# Altium PCB 2012_fdp_balise_mere.PcbDoc
Units mil, origin at the board's own origin, x right, y up, seen from the top; angles counter-clockwise.
Board outline 2776.01 x 2776 mil, 4 copper layers (1-TOP, 2-SIGNAL, 3-SIGNAL, 4-BOT); 69 components, 63 nets, 277 pads, 93 vias.
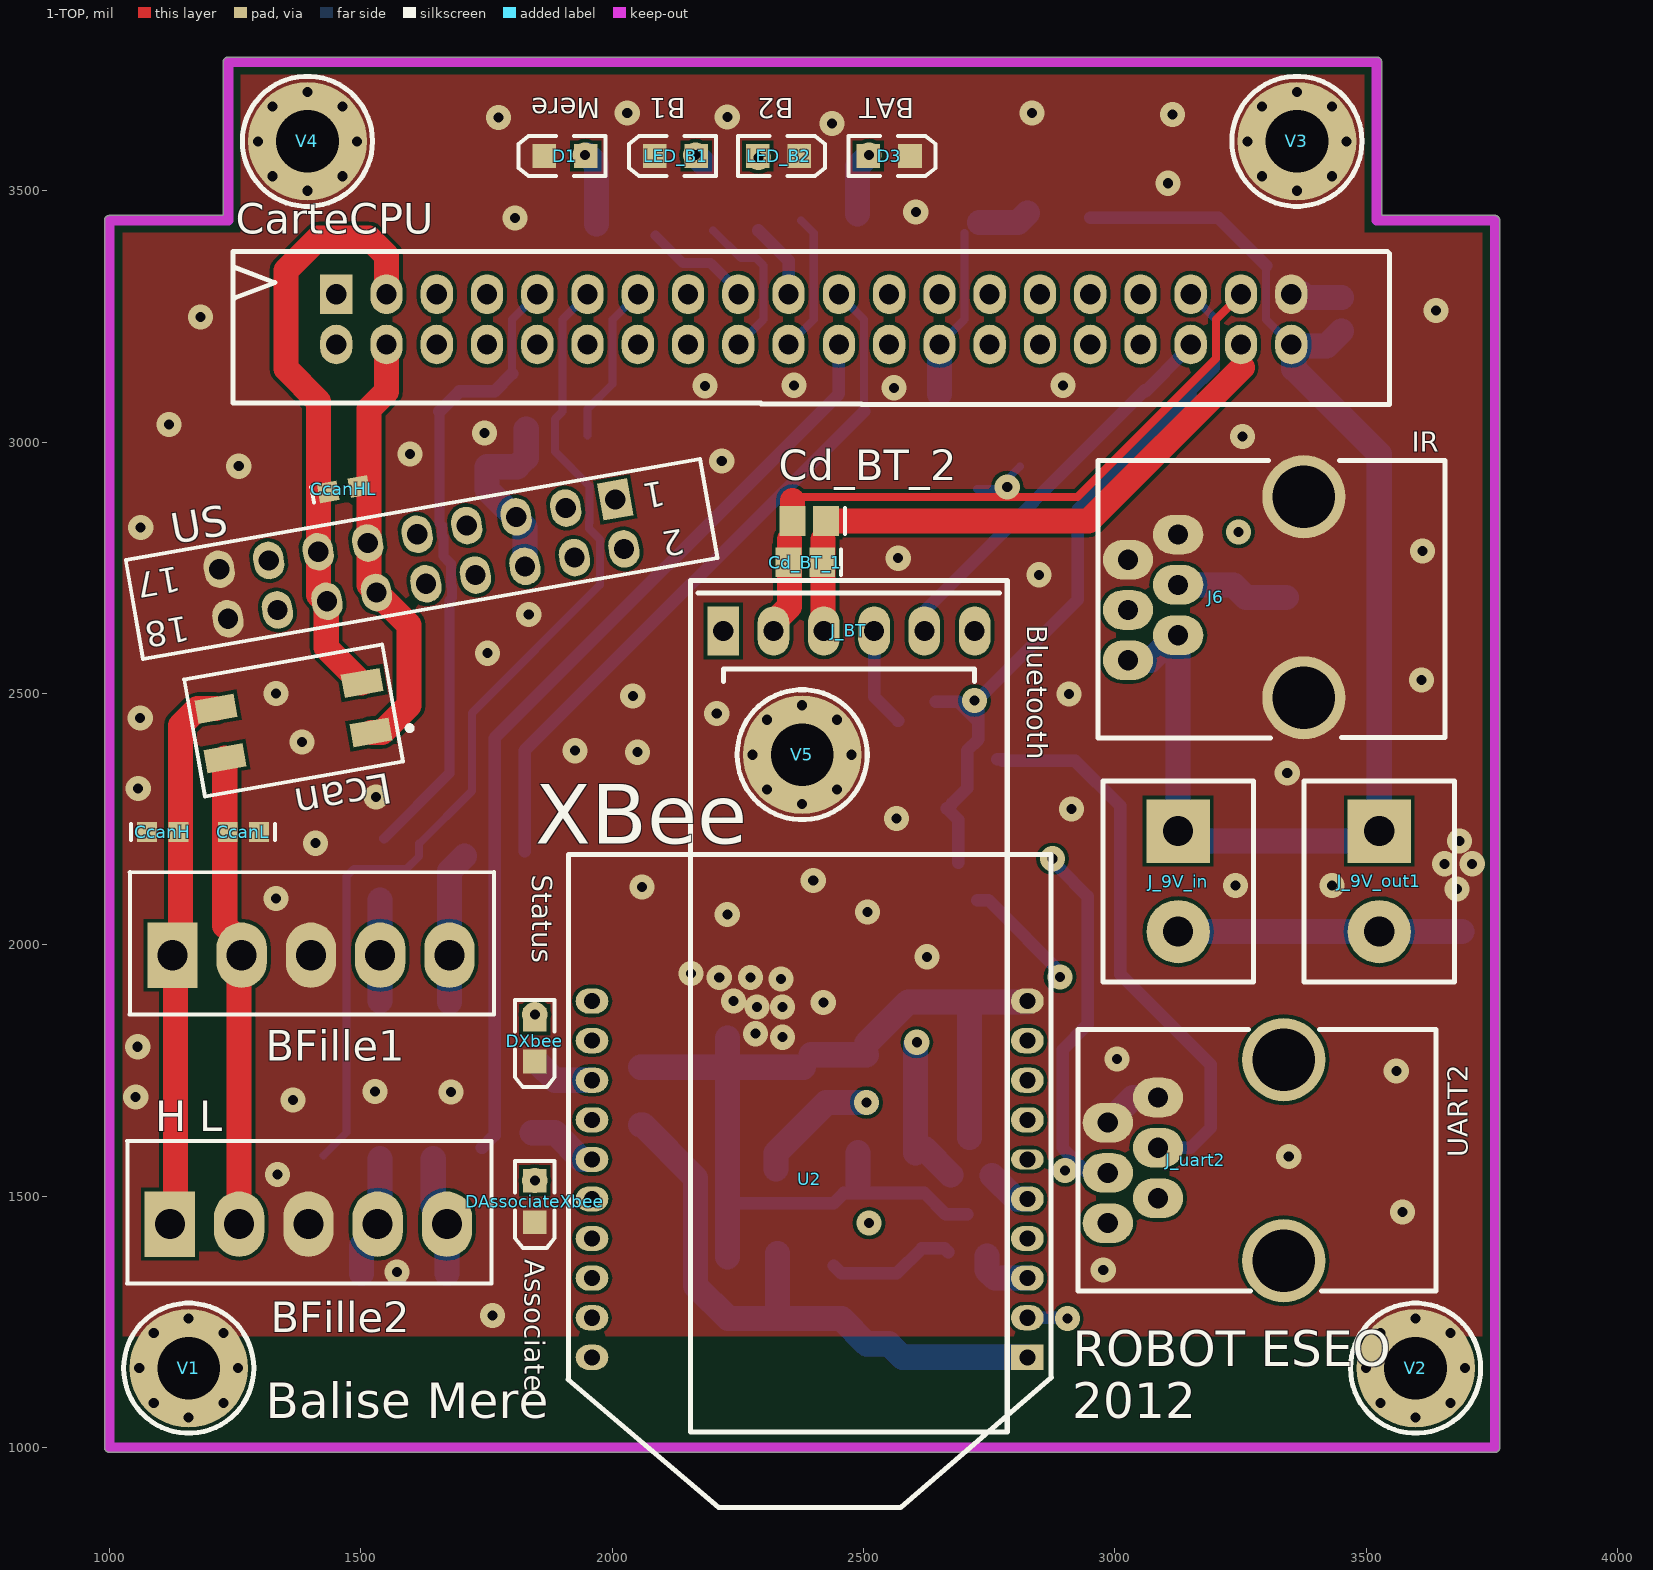
[diagram p0: 1-TOP view]
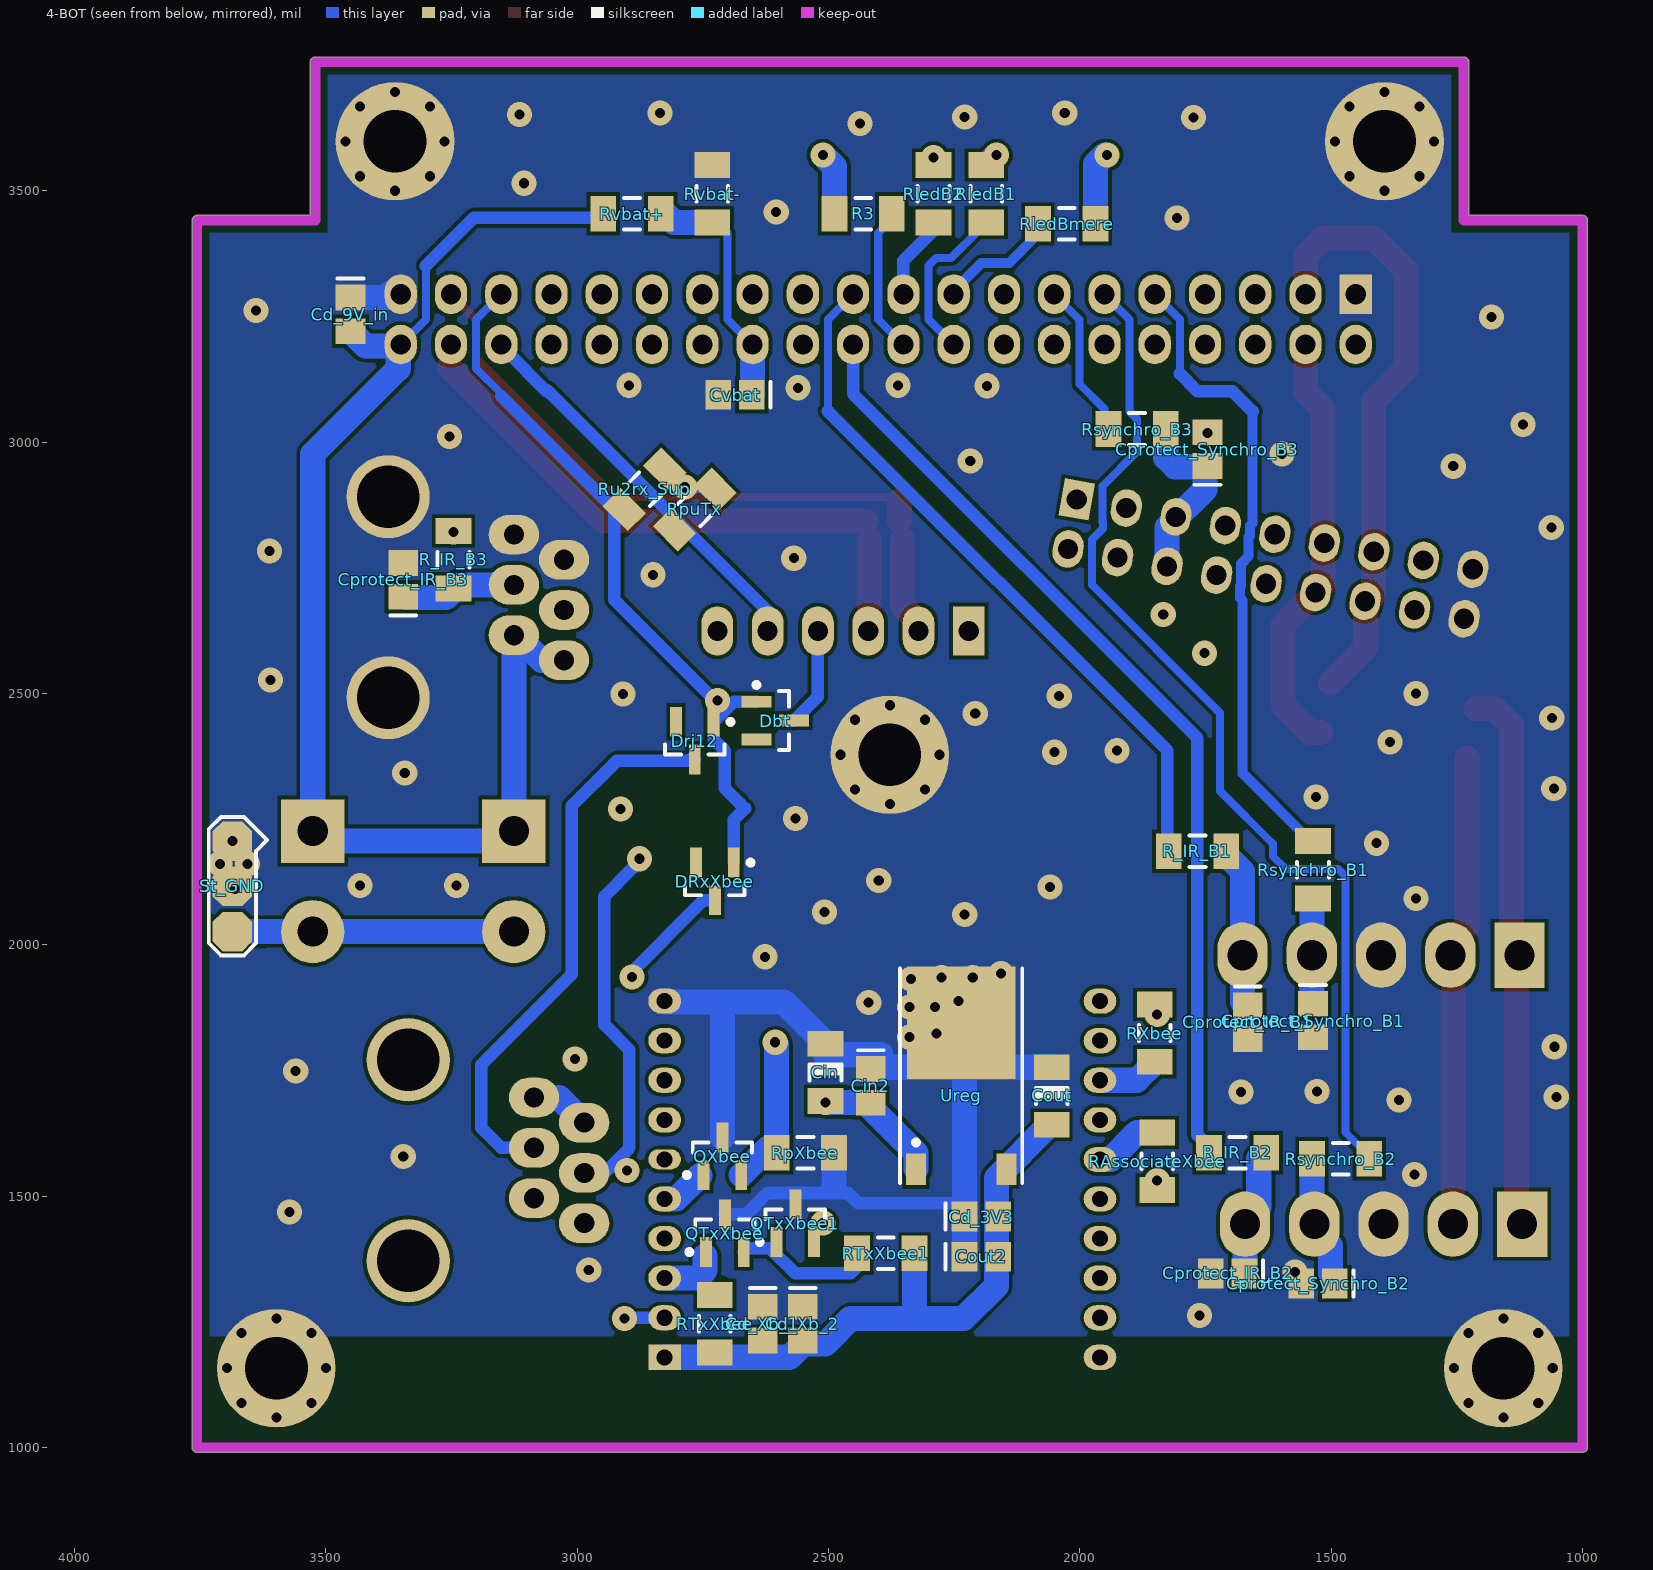
[diagram p1: 4-BOT view, seen from below]
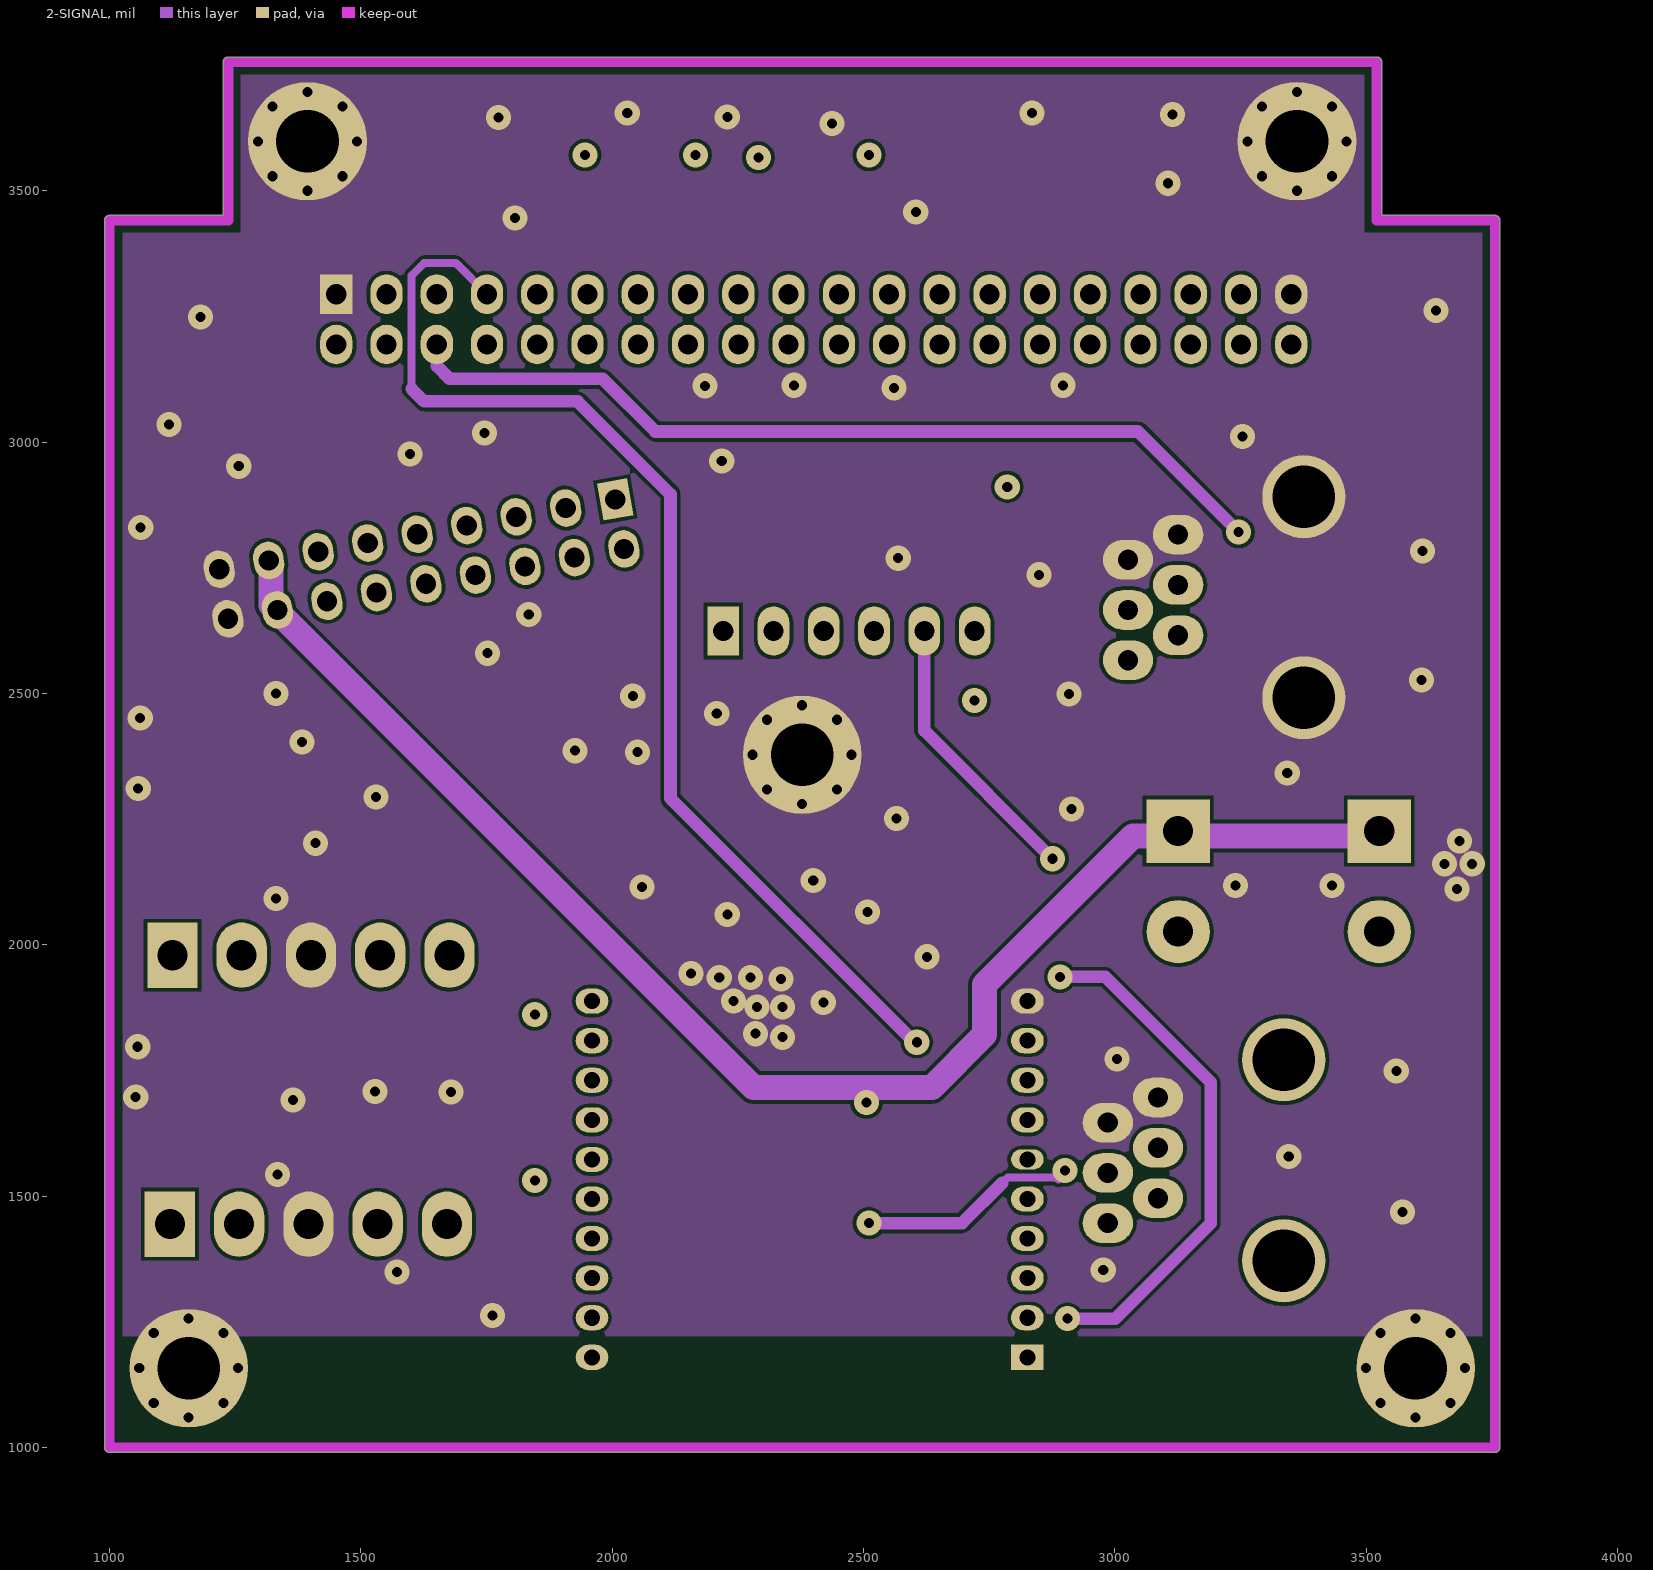
[diagram p2: 2-SIGNAL]
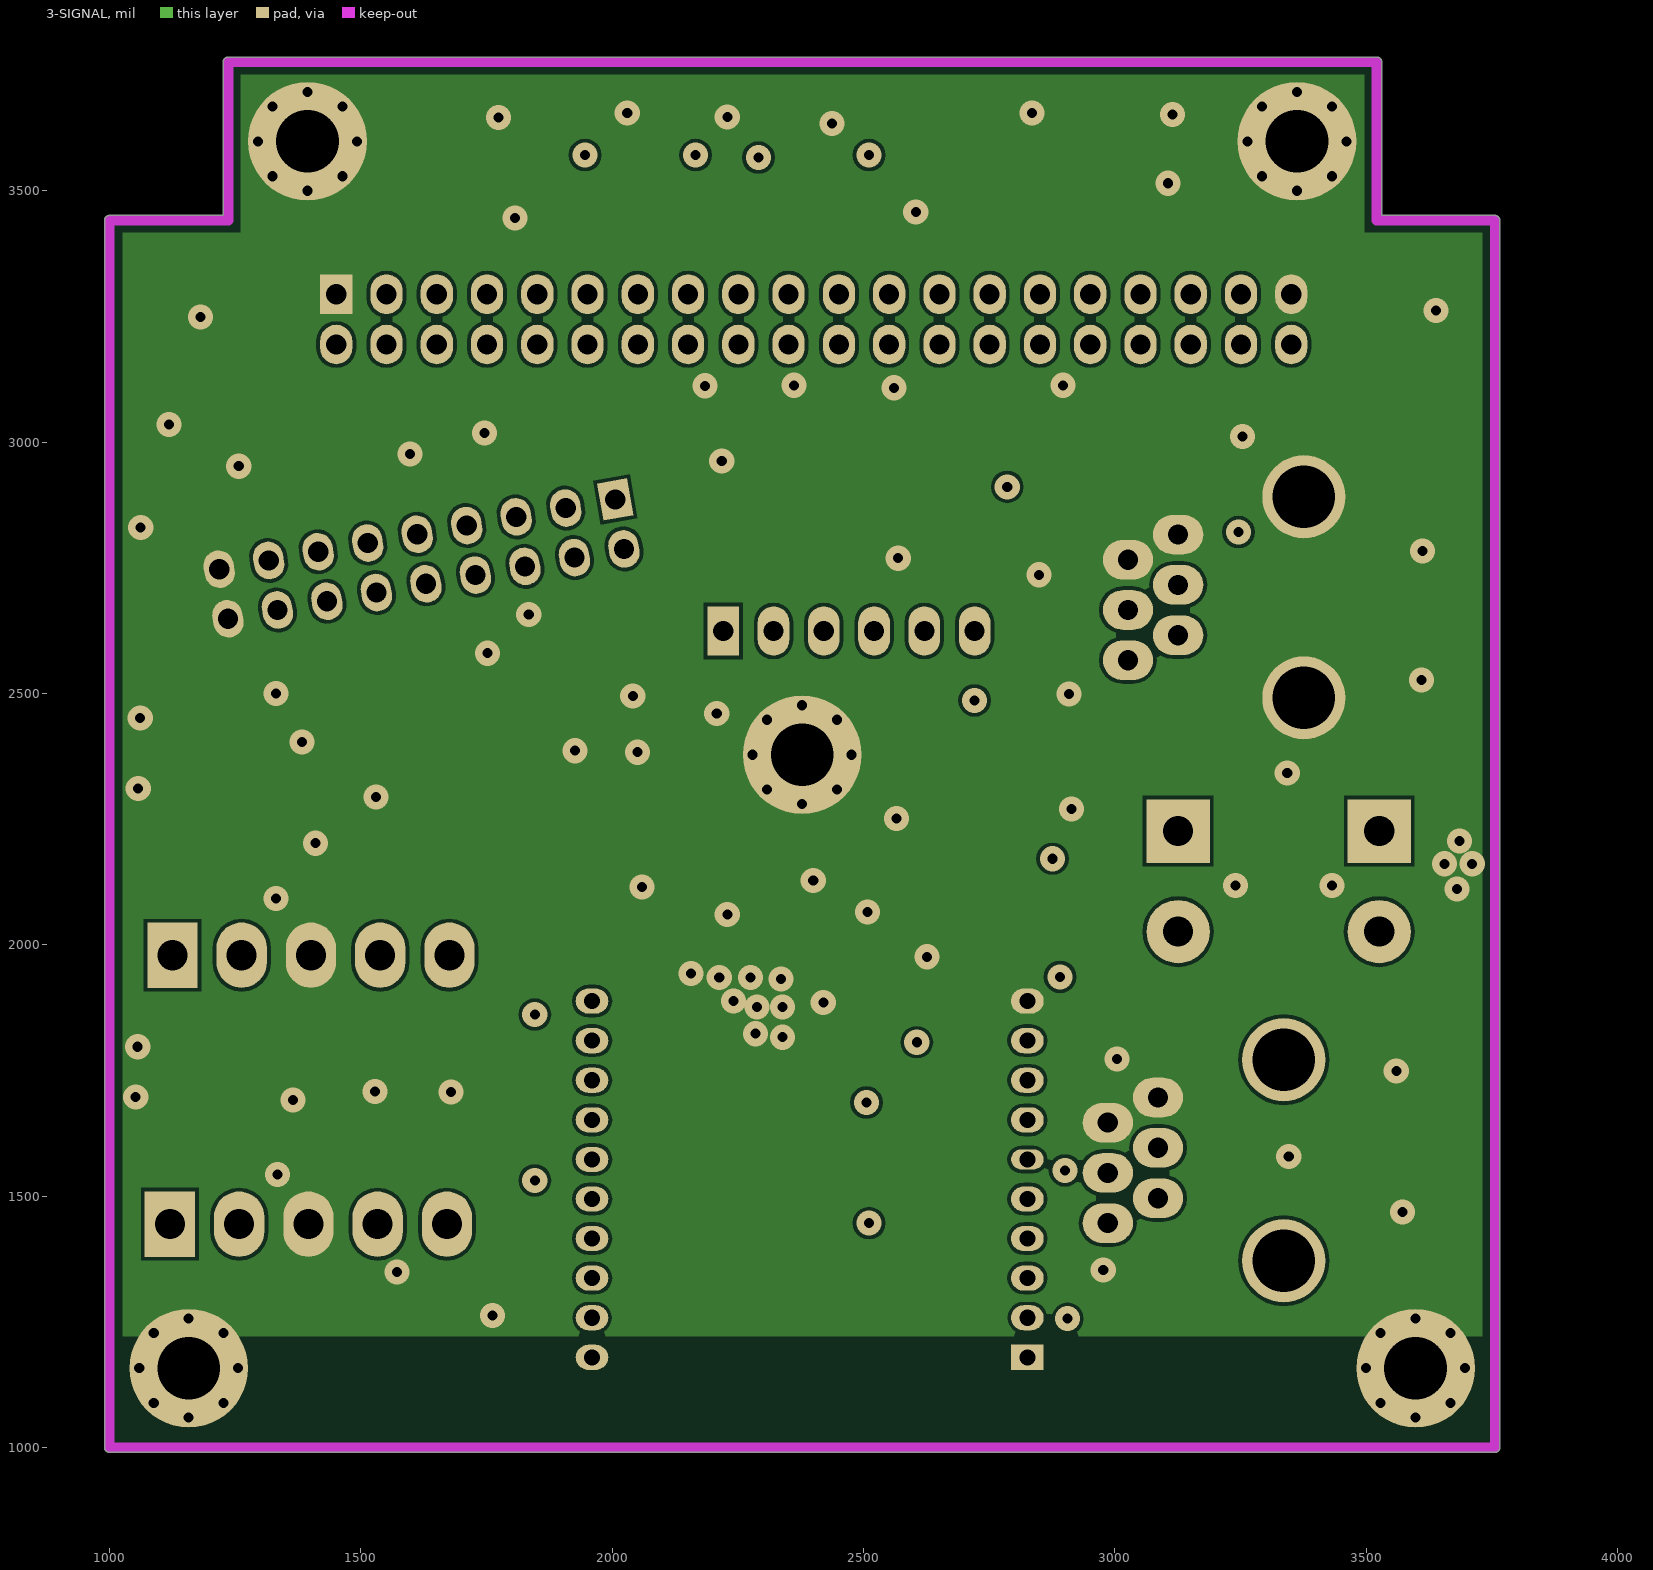
[diagram p3: 3-SIGNAL]
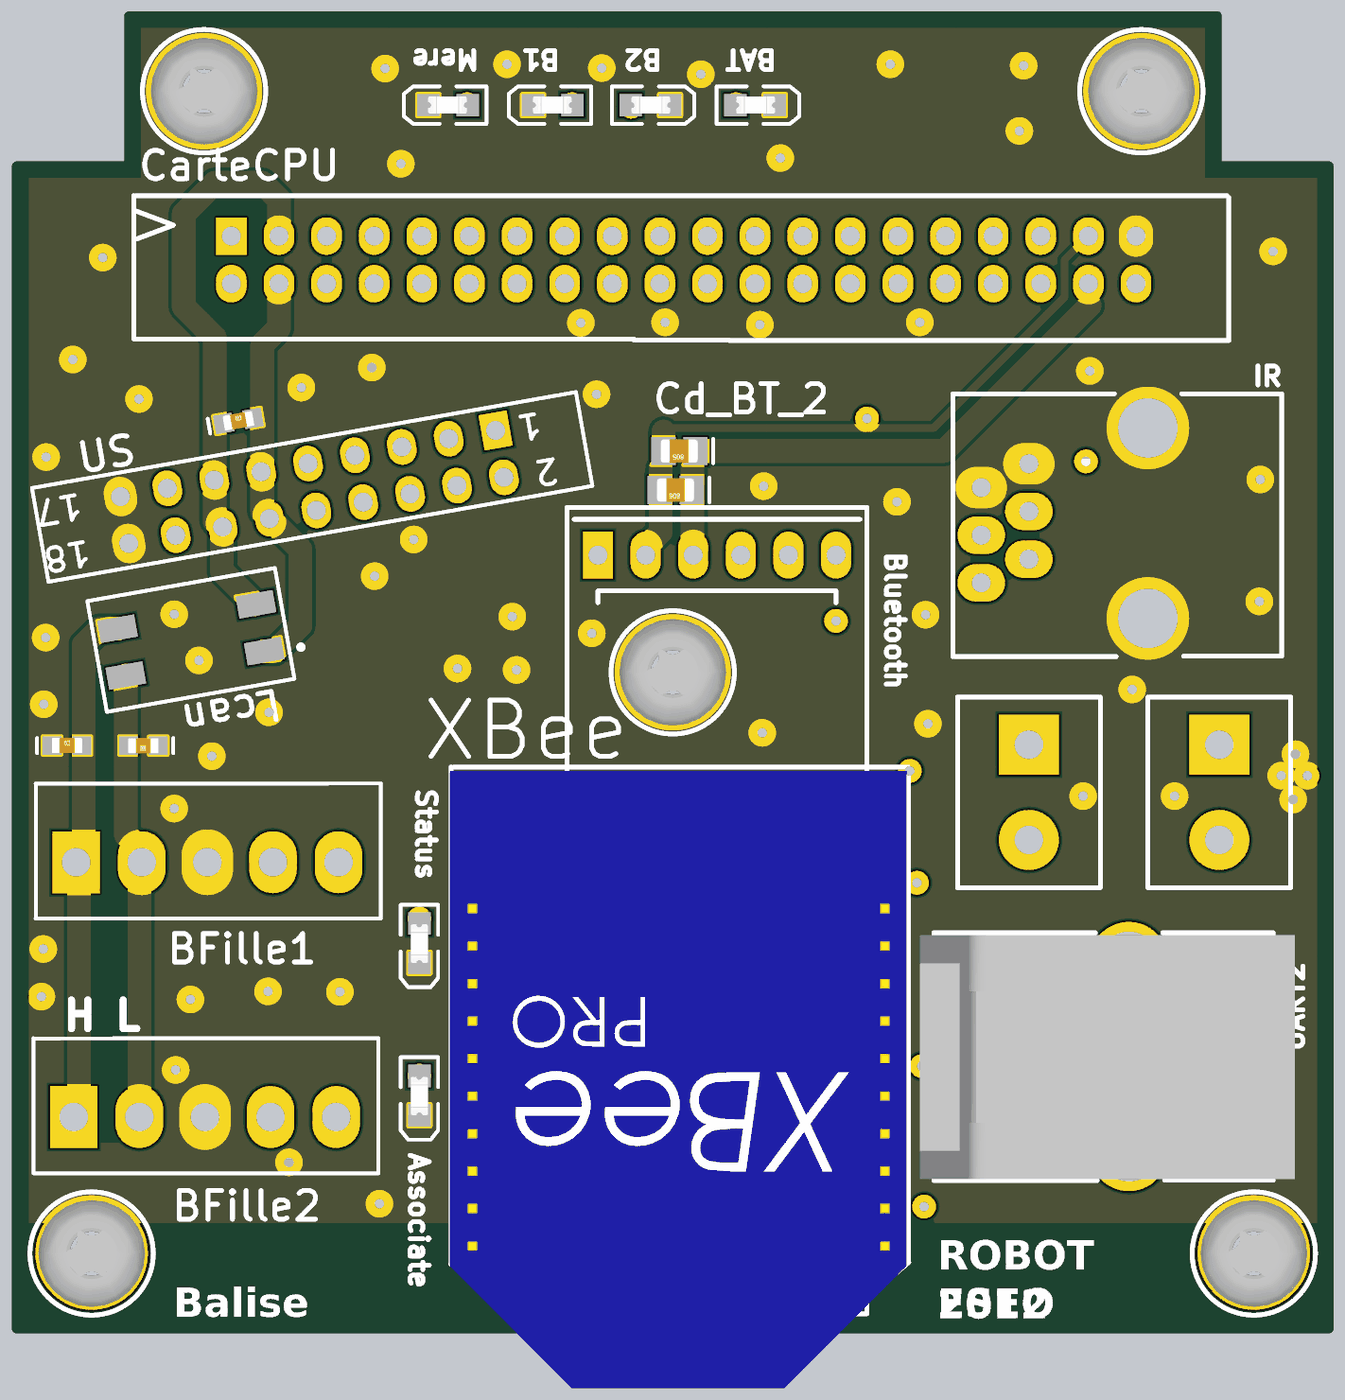
[diagram p4: 3D render of the assembled board from above, using the file's embedded part models]
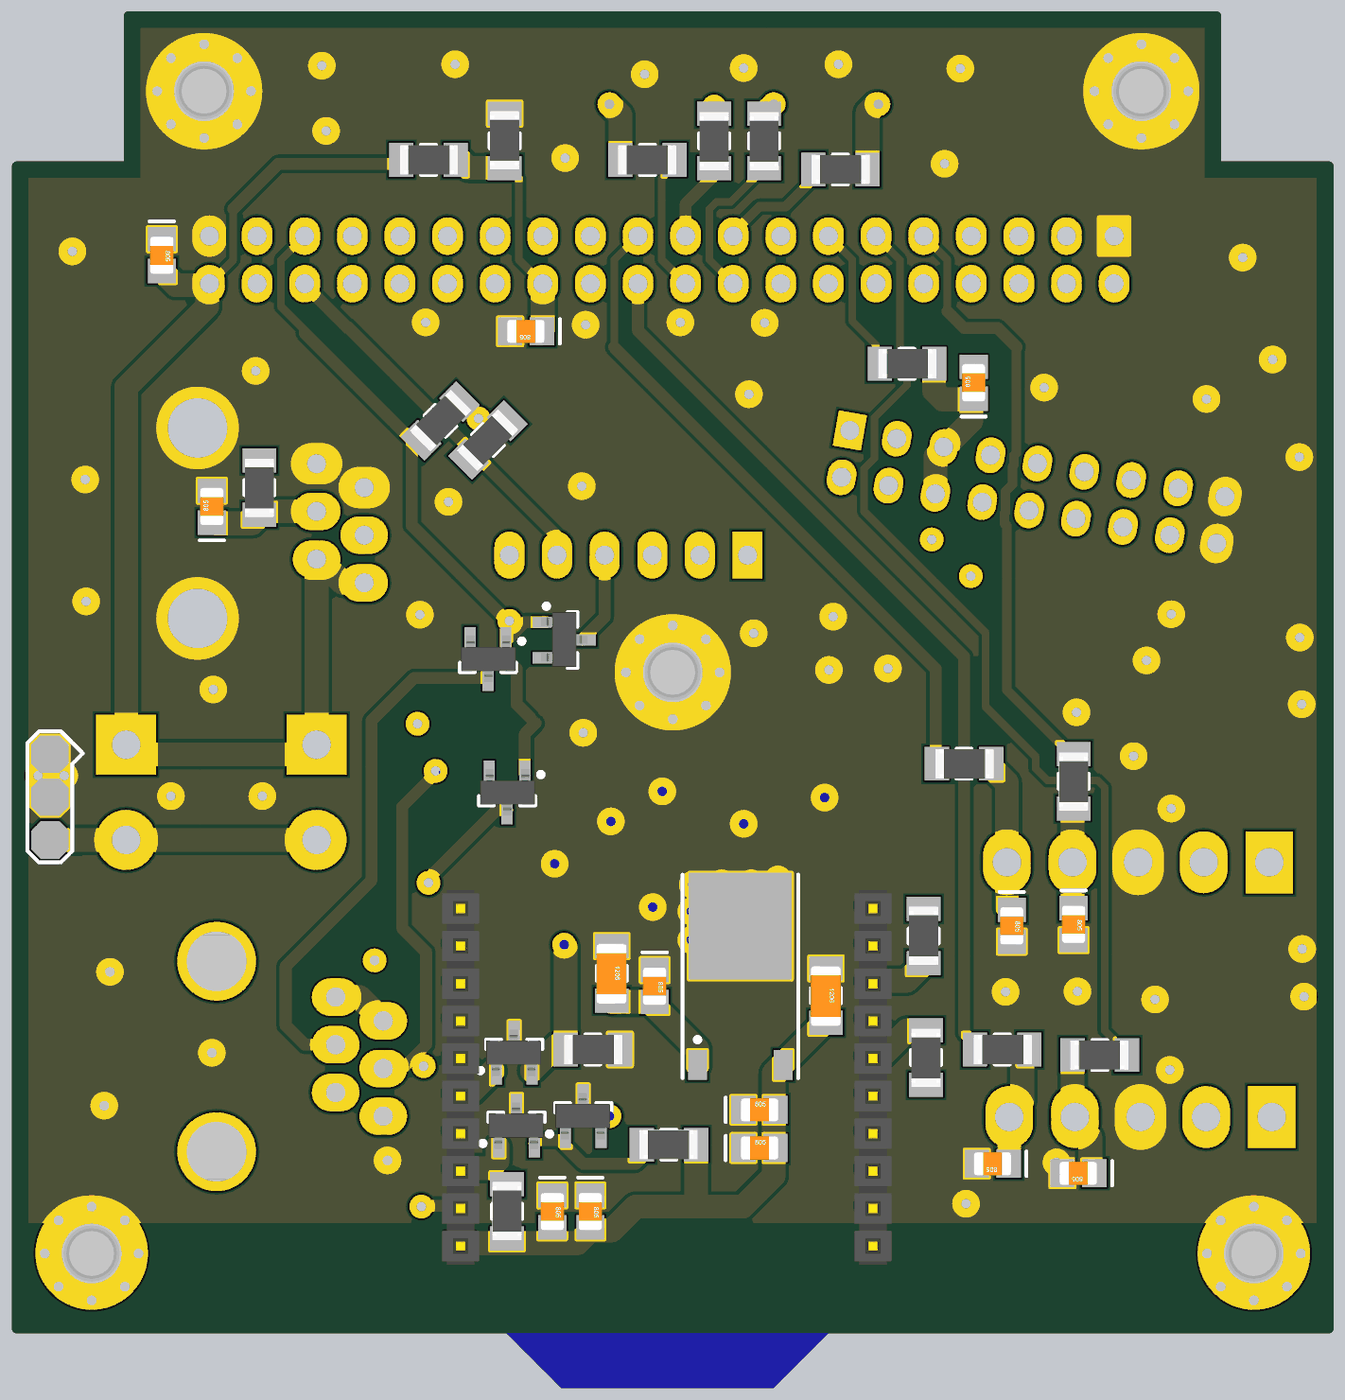
[diagram p5: 3D render of the assembled board from below, using the file's embedded part models]

## Layer stack, top to bottom
1-TOP: signal copper 1.4
Dielectric: core 12.6, FR-4, Dk 4.8
2-SIGNAL: signal copper 1.4
Dielectric: prepreg 12.6, FR-4, Dk 4.8
3-SIGNAL: signal copper 1.4
Dielectric: core 12.6, FR-4, Dk 4.8
4-BOT: signal copper 1.4

## Board outline
1000,989.98 cw(c1000,1000) 989.98,1000 989.98,3440.98 cw(c1000,3440.98) 1000,3451 1226.21,3451 1226.21,3753.74 cw(c1235.98,3755.91) 1235.98,3765.92 3519.73,3765.92 cw(c3520.98,3755.98) 3531,3755.98 3531,3451 3755.98,3451 cw(c3755.98,3440.98) 3766,3440.98 cw(c3755.98,3440.98) 3765.92,3439.73 3765.92,1001.25 cw(c3755.98,1000) 3766,1000 cw(c3755.98,1000) 3755.98,989.98

## Design rules (kind name [scope] priority, off if disabled: settings)
Clearance [All] p1: gap=7
FabricationTestpoint [(IsPad And (OnTopLayer Or OnBottomLayer))] p1: side=3 testpointundercomponent=TRUE minsize=40 maxsize=100 preferedsize=60 minholesize=0 maxholesize=40 preferedholesize=32 testpointgrid=1 allowsidetop=TRUE allowsidebottom=TRUE usegrid=TRUE gridtolerance=0.01
HoleSize [All] p1: absolutevalues=TRUE maxlimit=200 minlimit=1 maxpercent=80.000 minpercent=20.000
PlaneConnect [All] p1: planeconnectstyle=Direct reliefexpansion=20 reliefentries=4 reliefconductorwidth=10 reliefairgap=10
PolygonConnect [All] p1: connectstyle=Direct reliefconductorwidth=10 reliefentries=4 polygonreliefangle="90 Angle"
RoomDefinition 2012_fdp_balise_mere [InComponentClass('2012_fdp_balise_mere')] p1: confinementstyle=ConfineIn formatcopy=TRUE lockcomponents=FALSE outline 13530.98,2640.98 12680.98,2640.98 12680.98,2000.98 13530.98,2000.98
RoutingVias [All] p1: holewidth=28 width=50 viastyle="Through Hole" minholewidth=28 minwidth=50 maxholewidth=28 maxwidth=50
SilkscreenOverComponentPads [All] p1: minsilkscreentomaskgap=10
SolderMaskExpansion [All] p1: expansion=4
Width [All] p1: maxlimit=200 minlimit=10 preferedwidth=15
24 further rules are at their usual default settings.

## Components (designator, comment, footprint, x,y, rotation, side; value= is the part's Value field where it differs from the comment)
BFille1 "Header 5" BORNIER_5V_3.5MM 1125.98,1979.13 r0 top
BFille2 "Header 5" BORNIER_5V_3.5MM 1120.98,1444.13 r0 top
CarteCPU "ACTIONNEUR" HE10/40_MAL_DROIT-FDP-ROBOT 1450.98,3194.13 r0 top (schematic designator ACTIONNEUR)
CcanH "100pF_50V" C0603_N 1105.98,2224.13 r0 top
CcanHL "120pF_50V" C0603_N 1465.98,2905.98 r10 top
CcanL "100pF_50V" C0603_N 1265.98,2224.13 r180 top
Cd_3V3 "100nF" C0805_N 2195.98,1459.13 r180 bottom
Cd_9V_in "10uF" C0805_N 3450.98,3254.13 r270 bottom
Cd_BT_1 "10uF" C0805_N 2384.24,2760.98 r180 top
Cd_BT_2 "100nF" C0805_N 2392.05,2842.83 r180 top
Cd_Xb_1 "1uF" C0805_N 2630.98,1245.98 r270 bottom
Cd_Xb_2 "10pF" C0805_N 2550.98,1245.98 r270 bottom
Cin "10uF" C1206_N 2505.98,1745.98 r270 bottom
Cin2 "10nF" C0805_N 2415.98,1719.13 r270 bottom
Cout "10uF" C1206_N 2055.98,1699.13 r270 bottom
Cout2 "100nF" C0805_N 2195.98,1379.13 r180 bottom
Cprotect_IR_B1 "100p" C0805_N 1665.98,1845.98 r270 bottom
Cprotect_IR_B2 "100p" C0805_N 1705.98,1345.98 r0 bottom
Cprotect_IR_B3 "100p" C0805_N 3345.98,2725.98 r90 bottom
Cprotect_Synchro_B1 "100p" C0805_N 1535.98,1849.13 r270 bottom
Cprotect_Synchro_B2 "100p" C0805_N 1525.98,1325.98 r0 bottom
Cprotect_Synchro_B3 "100p" C0805_N 1745.98,2985.98 r90 bottom
Cvbat "100nF" C0805_N 2685.98,3094.13 r0 bottom
D1 "LED Jaune" LED_0805 1905.98,3569.13 r180 top
D3 "LED Rouge" LED_0805 2550.98,3569.13 r0 top
DAssociateXbee "LED Jaune" LED_0805 1845.98,1489.13 r270 top
Dbt "Diode Shottky double BAT54C" SOT23-3N 2605.98,2445.98 r180 bottom
Drj12 "Diode Shottky double BAT54C" SOT23-3N 2765.98,2405.98 r270 bottom
DRxXbee "Diode Shottky double BAT54C" SOT23-3N 2725.98,2125.98 r270 bottom
DXbee "LED Verte" LED_0805 1845.98,1809.13 r270 top
J6 "IR" "RJ11_6/6 - droit" 3025.98,2765.98 r0 top
J_9V_in "9V BAT" BORNIER2 3125.98,2225.98 r270 top
J_9V_out1 "9V BAT" BORNIER2 3525.98,2225.98 r270 top
J_BT "MHDR1X6" HE14_6 2220.98,2624.13 r0 top locked
J_uart2 "UART2 SUPERVISION" RJ11_6/6 2985.98,1645.98 r0 top
Lcan "2x51uH" "Self de mode commun Wurth Elektronik WE-SL2" 1365.98,2445.98 r190 top
LED_B1 "LED Jaune" LED_0805 2125.98,3569.13 r180 top
LED_B2 "LED Jaune" LED_0805 2330.98,3569.13 r0 top
QTxXbee "Transistor MOSFET-N" SOT23-3N 2705.98,1425.98 r90 bottom
QTxXbee1 "Transistor MOSFET-N" SOT23-3N 2565.98,1445.98 r90 bottom
QXbee "Transistor MOSFET-N" SOT23-3N 2710.98,1579.13 r90 bottom
R3 "1k" R1206_N 2430.98,3454.13 r0 bottom
R_IR_B1 "100" R1206_N 1765.98,2185.98 r180 bottom
R_IR_B2 "100" R1206_N 1685.98,1585.98 r180 bottom
R_IR_B3 "100" R1206_N 3245.98,2765.98 r270 bottom
RAssociateXbee "1k" R1206_N 1845.98,1569.13 r270 bottom
RledB1 "1k" R1206_N 2185.98,3494.13 r270 bottom
RledB2 "1k" R1206_N 2290.98,3494.13 r270 bottom
RledBmere "1k" R1206_N 2025.98,3434.13 r180 bottom
RpuTx "10k" R1206_N 2765.98,2865.98 r315 bottom
RpXbee "10k" R1206_N 2545.98,1585.98 r180 bottom
Rsynchro_B1 "100" R1206_N 1535.98,2149.13 r270 bottom
Rsynchro_B2 "100" R1206_N 1480.98,1574.13 r0 bottom
Rsynchro_B3 "100" R1206_N 1885.98,3025.98 r180 bottom
RTxXbee "10k" R1206_N 2725.98,1245.98 r90 bottom
RTxXbee1 "10k" R1206_N 2385.98,1385.98 r0 bottom
Ru2rx_Sup "1K" R1206_N 2865.98,2905.98 r135 bottom
Rvbat+ "100k" R1206_N 2890.98,3454.13 r180 bottom
Rvbat- "47k" R1206_N 2730.98,3494.13 r90 bottom
RXbee "1k" R1206_N 1850.98,1824.13 r90 bottom
St_GND "Goutte Strap_3" "Goutte Strap_3" 3685.98,2205.98 r270 bottom
U2 "XBee" MODULE_XBEE 2825.98,1179.13 r180 top locked
Ureg "1924880" 369A-13 2235.98,1699.13 r180 bottom
US "Header 9X2" HDR2X9 2005.98,2885.98 r190 top
V1 "Pad_M3" M3x6mm 1157.48,1157.48 r0 top
V2 "Pad_M3" M3x6mm 3598.42,1157.48 r0 top
V3 "Pad_M3" M3x6mm 3362.2,3598.42 r0 top
V4 "Pad_M3" M3x6mm 1393.7,3598.42 r0 top
V5 "Pad_M3" M3x6mm 2377.95,2377.95 r0 top

## Footprints (in the part's own frame and the unit in brackets; to place one, negate y for a bottom-side part, rotate by r counter-clockwise, add the part's x,y. Pads: shape width x height; smd on the part's side, far side on the other; paste and mask are expansions set on the pad)
369A-13 [mm] "D-PAK/TO-252-AA; 3 Leads (1 Cropped); Body 10.3 (inc. leads) x 6.7 mm (LxW max)"
  rect 1x1.6 smd: 1(-2.285,-3.7) 3(2.285,-3.7)
  rect 5.5x5.7 smd: 4(0,3.7)
  silkscreen extent -3.09,-4.4 3.09,6.45
BORNIER2 [mm] "Connector; Header; 2 Position; screw terminal blocks, Pin Spacing=5.08mm"
  rect 3.2x3.2 hole 1.524: 1(0,0)
  round 3.2 hole 1.524: 2(5.08,0)
  silkscreen extent -2.54,-3.81 7.62,3.81
BORNIER_5V_3.5MM [mil]
  rect 100x130 hole 60: 1(-1,0)
  oval 100x130 hole 60: 2(136.8,0) 3(274.59,0) 4(412.39,0) 5(550.18,0)
  silkscreen extent -86,-118 639,165
C0603_N [mm] "Chip Capacitor, Body 1.6x0.8mm, IPC Medium Density"
  rect 1x1 smd: 1(-0.8,0) 2(0.787,0)
  silkscreen extent -1.6,-0.4 -1.6,0.4, body extent -0.8,-0.39 0.8,0.41, height 0.32
C0805_N [mm] "Chip Capacitor, Body 2.0x1.3mm, IPC Medium Density"
  rect 1.3x1.5 smd: 1(-0.85,0) 2(0.85,0)
  silkscreen extent -1.8,-0.65 -1.8,0.65, body extent -0.99,-0.63 1.01,0.63, height 0.8
C1206_N [mm] "Chip Capacitor, Body 3.2x1.6mm, IPC Medium Density"
  rect 1.3x1.8 smd: 1(-1.45,0) 2(1.45,0)
  silkscreen extent -0.4,-0.8 0.4,0.8, body extent -1.57,-0.81 1.63,0.79, height 1.02
"Goutte Strap_3" [mm] "3 Pads CMS Goutte Strap"
  oct 2x2 smd: 1(0,0) 2(2.286,0) 3(4.572,0)
  silkscreen extent -1.22,-1.19 5.77,1.75
HDR2X9 [mil]
  rect 60x75 hole 40: 1(0,0)
  oval 60x75 hole 40: 2(0,100) 3(100,0) 4(100,100) 5(200,0) 6(200,100) 7(300,0) 8(300,100) 9(400,0) 10(400,100) 11(500,0) 12(500,100) 13(600,0) 14(600,100) 15(700,0) 16(700,100) 17(800,0) 18(800,100)
  silkscreen extent -180,-50 980,150
HE10/40_MAL_DROIT-FDP-ROBOT [mm] "Connector; HE10; 40 Position; Male; Right Angle; Pin Spacing=2.54mm"
  rect 1.63x2 hole 1.016: 1(0,2.54)
  oval 1.63x2 hole 1.016: 2(0,0) 3(2.54,2.54) 4(2.54,0) 5(5.08,2.54) 6(5.08,0) 7(7.62,2.54) 8(7.62,0) 9(10.16,2.54) 10(10.16,0) 11(12.7,2.54) 12(12.7,0) 13(15.24,2.54) 14(15.24,0) 15(17.78,2.54) 16(17.78,0) 17(20.32,2.54) 18(20.32,0) 19(22.86,2.54) 20(22.86,0) 21(25.4,2.54) 22(25.4,0) 23(27.94,2.54) 24(27.94,0) 25(30.48,2.54) 26(30.48,0) 27(33.02,2.54) 28(33.02,0) 29(35.56,2.54) 30(35.56,0) 31(38.1,2.54) 32(38.1,0) 33(40.64,2.54) 34(40.64,0) 35(43.18,2.54) 36(43.18,0) 37(45.72,2.54) 38(45.72,0) 39(48.26,2.54) 40(48.26,0)
  silkscreen extent -5.21,-3.02 53.21,4.7, body extent -5.21,-3.12 53.29,4.7, height 10
HE14_6 [mm] "Connector; HE14; 6 Position; Pin Spacing=2.54mm"
  rect 1.6x2.5 hole 1.016: 1(0,0)
  oval 1.6x2.5 hole 1.016: 2(2.54,0) 3(5.08,0) 4(7.62,0) 5(10.16,0) 6(12.7,0)
  silkscreen extent -1.65,-40.47 14.35,2.54
LED_0805 [mm] "SM LED; 2 Flat Leads"
  rect 1.2x1.2 smd: 1(-1.05,0) 2(1.05,0)
  silkscreen extent -2.05,-1 2.35,1, body extent -1.05,-0.64 1.06,0.64, height 1.2
M3x6mm [mm] "Vis M3 X 6mm _TORX_Tête 6mm"
  round 0.8 hole 0.508: 1(-2.5,0) 1(-1.768,-1.768) 1(-1.768,1.768) 1(0,-2.5) 1(0,2.5) 1(1.768,-1.768) 1(1.768,1.768) 1(2.5,0)
  round 6 hole 3.175: 1(0,0)
  silkscreen extent -3.29,-3.28 3.29,3.28, body extent -2.84,-2.85 2.86,2.85, height 1.67
MODULE_XBEE [mil] "XBee Series 2 OEM RF Modules"
  rect 65x50 hole 32: 1(0,0)
  oval 65x50 hole 32: 2(0,-78.74) 3(0,-157.48) 4(0,-236.22) 5(0,-314.96) 7(0,-472.44) 8(0,-551.18) 9(0,-629.92) 10(0,-708.66) 11(866.14,-708.66) 12(866.14,-629.92) 13(866.14,-551.18) 14(866.14,-472.44) 15(866.14,-393.7) 16(866.14,-314.96) 17(866.14,-236.22) 18(866.14,-157.48) 19(866.14,-78.74) 20(866.14,0)
  oval 65x40 hole 32: 6(0,-393.7)
  silkscreen extent -48,-1000 914,299, body extent -43,-992 917,305, height 122
R1206_N [mm] "Chip Resistor, Body 3.2x1.6mm, IPC Medium Density"
  rect 1.3x1.8 smd: 1(-1.45,0) 2(1.45,0)
  silkscreen extent -0.4,-0.8 0.4,0.8, body extent -1.68,-0.87 1.68,0.87, height 0.71
RJ11_6/6 [mm] "Connector; RJ11; 6P/6C; Low Profil; Right Angle; Pin Spacing=2.54mm"
  oval 2.54x2 hole 1.016: 1(0,-5.08) 2(2.54,-3.82) 3(0,-2.54) 4(2.54,-1.27) 5(0,0) 6(2.54,1.27)
  round 4.2 hole 3.175: FIX1(8.89,3.18) FIX2(8.89,-6.98)
  silkscreen extent -1.51,-8.51 16.59,4.7, body extent -2.25,-8.43 17.75,4.57, height 16
"RJ11_6/6 - droit" [mm] "Connector; RJ11; 6P/6C; Low Profil; Right Angle; Pin Spacing=2.54mm"
  oval 2.54x2 hole 1.016: 1(0,-5.08) 2(2.54,-3.82) 3(0,-2.54) 4(2.54,-1.27) 5(0,0) 6(2.54,1.27)
  round 4.2 hole 3.175: FIX1(8.89,3.18) FIX2(8.89,-6.98)
  silkscreen extent -1.51,-9.02 16.03,5, body extent -1.52,-9.04 15.83,4.98, height 16.38
"Self de mode commun Wurth Elektronik WE-SL2" [mm] "Self de mode commun Wurth Elektronik WE-SL2"
  rect 2x1.2 smd: 1(-3.75,-1.27) 2(-3.75,1.27) 3(3.75,1.27) 4(3.75,-1.27)
  silkscreen extent -5.84,-3 5.08,3, body extent -4.6,-3 4.6,3, height 5
SOT23-3N [mm] "SOT23, 3-Leads, Body 2.9x1.3mm, Pitch 0.95mm, Lead Span 2.5mm, IPC Medium Density"
  rect 1.5x0.6 smd: 1(-0.95,0.95) 2(-0.95,-0.95) 3(0.95,0)
  silkscreen extent -1.07,-1.5 0.7,1.92, body extent -1.24,-1.5 1.23,1.5, height 1.1

## Part data
BFille1 BFille2: "Header, 5-Pin"
CarteCPU: library part HE10/40, "Connector; HE10; 40 Position; Male"
CcanH CcanHL CcanL Cin Cin2 Cout Cout2 Cprotect_IR_B1 Cprotect_IR_B2 Cprotect_IR_B3 Cprotect_Synchro_B1 Cprotect_Synchro_B2 Cprotect_Synchro_B3 Cvbat: library part Capacitor, "Capacitor"
Cd_3V3 Cd_9V_in Cd_BT_1 Cd_BT_2 Cd_Xb_1 Cd_Xb_2: library part Condensateur, "Capacitor"
D1 D3 DAssociateXbee DXbee LED_B1 LED_B2: library part LED, "Typical LED"
Dbt Drj12 DRxXbee: "DIODE SCHOTTKY DOUBLE"
J6: library part CONNECTEUR_RJ12
J_9V_in J_9V_out1: library part BORNIER2, "Terminal blocks, 2 pins, pitch=5mm"
J_BT: "Header, 6-Pin"
J_uart2: library part RJ11_6/6, "Right Angle, Standard Profile, Offset Latch DECconnect, Flangeless PCB Jack"
Lcan: library part "Self de mode commun WE-744220", "Self de mode commun, Wurth Elektronik, WE-SL2"
QTxXbee QTxXbee1 QXbee: "N-Channel MOSFET"
R3 R_IR_B1 R_IR_B2 R_IR_B3 RAssociateXbee RledB1 RledB2 RledBmere RpuTx RpXbee Rsynchro_B1 Rsynchro_B2 Rsynchro_B3 RTxXbee RTxXbee1 Ru2rx_Sup Rvbat+ Rvbat- RXbee: library part Resistor, "Resistor"
Ureg: library part MC7805ACD2T, "Three-Terminal Positive Voltage Regulator"
US: "Header, 9-Pin, Dual row"
V1 V2 V3 V4 V5: library part "Vis M3 X 6mm _TORX_Tête 6mm", "Vis M3 X 6mm _TORX_Tête 6mm"

## Via types
v1: diameter 50, hole 20, 1-TOP to 4-BOT, 93 vias

## Nets (pads, with @x,y where several pads share a name; then routed paths per layer and width w, separated by ;. In a path a pad name is that pad's centre, name@x,y a point inside that pad or via, vN(x,y) a via of type N, cw(c..) or ccw(c..) an arc to the next point about the centre after c; other vN are vias at no path point)
3V3: Cd_3V3.2 Cd_Xb_1.2 Cd_Xb_2.2 Cout2.2 Cout.2 RTxXbee1.1 RTxXbee.1 U2.1 Ureg.3 | length 1210.2
  4-BOT w50: Cout.2@2055.98,1640.98 2060.98,1640.98 2165.98,1535.98 2165.98,1320.98 2230.98,1255.98 2455.98,1255.98 2505.98,1205.98 2550.98,1205.98 2577.83,1179.13 U2.1 ; 2328.9,1263.07 RTxXbee1.1
5V_MERE: CarteCPU.37 Cd_BT_1.2 Cd_BT_2.2 J_BT.2 RpuTx.1 Ru2rx_Sup.2 | length 1425.4
  1-TOP w16: 2360.98,2890.98 2925.98,2890.98 3200.98,3165.98 3200.98,3244.13 CarteCPU.37
  1-TOP w50: J_BT.2@2320.98,2640.98 2352.52,2672.52 2352.52,2805.98 ; Cd_BT_2.2 2358.58,2883.58
  4-BOT w16: RpuTx.1 2766.35,2906.35 Ru2rx_Sup.2@2810.98,2950.98
  other v1: 2785.98,2910.98
ACT_RD0: CarteCPU.2
AN2: CarteCPU.26 Cvbat.1 Rvbat+.2 Rvbat-.1 | length 443.6
  4-BOT w16: CarteCPU.26 2700.98,3244.13 Rvbat-.1@2700.98,3415.98
  4-BOT w50: Cvbat.1@2650.98,3095.98 CarteCPU.26 ; Rvbat-.1 2807.05,3437.05 Rvbat+.2@2825.98,3455.98
AN3: CarteCPU.25
AN8: CarteCPU.34
AN9: CarteCPU.33
AN10: CarteCPU.32
AN11: CarteCPU.31
AN12: CarteCPU.30
AN13: CarteCPU.29
AN14: CarteCPU.28
AN15: CarteCPU.27
B1_IR: BFille1.5 Cprotect_IR_B1.1 R_IR_B1.2 | length 302.2
  4-BOT w50: Cprotect_IR_B1.1@1676.17,1886.17 BFille1.5 1676.17,2146.17 R_IR_B1.2@1705.98,2175.98
B2_IR: BFille2.5 Cprotect_IR_B2.1 R_IR_B2.2 | length 239.4
  4-BOT w50: R_IR_B2.2@1643.9,1574.13 1643.9,1478.07 1670.98,1450.98 Cprotect_IR_B2.1@1670.98,1345.98
B3_IR: Cprotect_IR_B3.1 J6.4 R_IR_B3.2 | length 225.4
  4-BOT w50: J6.4 3235.98,2715.98 3260.98,2690.98 Cprotect_IR_B3.1@3340.98,2690.98
BUS_CAN_H: BFille1.1 BFille2.1 CcanH.2 Lcan.4 | length 1079
  1-TOP w50: BFille2.1@1130.98,1445.98 1130.98,1960.98 1140.98,1970.98 1140.98,2435.98 1174.59,2469.59 Lcan.4
BUS_CAN_L: BFille1.2 BFille2.2 CcanL.2 Lcan.3 | length 922.5
  1-TOP w50: Lcan.3 1229.27,2037.7 BFille1.2@1270.98,1995.98 ; BFille2.2 BFille1.2@1257.78,1974.19
CAN_H: CarteCPU.3 CcanHL.1 Lcan.1 US.13 US.14 | length 1203.6
  1-TOP w50: Lcan.1@1500.98,2520.98 1430.98,2590.98 1430.98,2680.98 1415.98,2695.98 1415.98,3080.98 1350.98,3145.98 1350.98,3340.98 1415.98,3405.98 1515.98,3405.98 1550.98,3370.98 CarteCPU.3 CarteCPU.3@1550.98,3290.98
CAN_L: CarteCPU.4 CcanHL.2 Lcan.2 US.11 US.12 | length 865.8
  1-TOP w50: Lcan.2 1542.38,2422.38 1595.98,2475.98 1595.98,2635.98 1515.98,2715.98 1515.98,3065.98 1550.98,3100.98 CarteCPU.4 CarteCPU.4@1550.98,3195.98
GND: BFille1.3 BFille2.3 CarteCPU.1 CarteCPU.39 CcanH.1 CcanL.1 Cd_3V3.1 Cd_9V_in.1 Cd_Xb_1.1 Cd_Xb_2.1 Cin2.1 Cin.1 Cout2.1 Cout.1 Cprotect_IR_B1.2 Cprotect_IR_B2.2 Cprotect_IR_B3.2 Cprotect_Synchro_B1.2 Cprotect_Synchro_B2.2 Cprotect_Synchro_B3.2 Cvbat.2 D1.2 D3.2 DAssociateXbee.2 DXbee.2 J6.5 J6.6 J6.FIX1 J6.FIX2 J_uart2.5 J_uart2.6 LED_B1.2 LED_B2.2 QTxXbee1.3 QTxXbee.3 QXbee.3 RpXbee.2 Rvbat-.2 St_GND.1 St_GND.2 U2.10 Ureg.4 US.17 US.18 V1.1 V2.1 V3.1 V4.1 V5.1 | length 2275.2
  4-BOT w25: Cd_3V3.1@2229.45,1485.98 2440.98,1485.98 2460.98,1505.98 2620.98,1505.98 2663.58,1463.39 QTxXbee.3
  4-BOT w50: Cout.1 2380.75,1756.22 ; Cout2.1 Ureg.4@2229.45,1814.45 ; 2395.98,1780.98 Cin.1@2505.98,1780.98 ; 2488.9,1523.07 RpXbee.2 ; Cin.1 2588.9,1885.98 U2.10@2825.98,1885.98 ; QXbee.3 2710.98,1880.98 ; J_uart2.5 3035.98,1695.98 J_uart2.6 ; CarteCPU.39@3370.98,3295.98 3362.6,3287.6 Cd_9V_in.1
  other v1: 1761.98,1261.98 1571.98,1348.98 2976.98,1352.98 3571.98,1467.98 1333.98,1542.98 3345.98,1578.98 1364.98,1690.98 1051.98,1696.98 1678.98,1706.98 1527.98,1707.98 3559.98,1748.98 3003.98,1772.98 1055.98,1796.98 2338.98,1815.98 2284.98,1822.98 2287.98,1875.98 2338.98,1875.98 2419.98,1884.98 2240.98,1887.98 2335.98,1931.98 2212.98,1934.98 2274.98,1934.98 2156.98,1942.98 2625.98,1975.98 2228.98,2059.98 2507.98,2064.98 1330.98,2091.98 3680.98,2110.98 2058.98,2114.98 3239.98,2117.98 3431.98,2117.98 2399.98,2127.98 3655.98,2160.98 3710.98,2160.98 1409.98,2201.98 3685.98,2205.98 2565.98,2250.98 2913.98,2269.98 1529.98,2293.98 1056.98,2310.98 3342.98,2341.98 2049.98,2382.98 1925.98,2385.98 1382.98,2402.98 1060.98,2450.98 2207.98,2459.98 2040.98,2494.98 2908.98,2498.98 1330.98,2499.98 3609.98,2526.98 1751.98,2579.98 1833.98,2656.98 2848.98,2735.98 2568.98,2768.98 3611.98,2782.98 1061.98,2829.98 1256.98,2951.98 2217.98,2961.98 1597.98,2975.98 3253.98,3010.98 1745.98,3017.98 1117.98,3034.98 2560.98,3107.98 2184.98,3111.98 2361.98,3112.98 2896.98,3112.98 1180.98,3248.98 3638.98,3261.98 1806.98,3445.98 2603.98,3457.98 3105.98,3514.98 2436.98,3633.98 1773.98,3645.98 2228.98,3646.98 3114.98,3651.98 2029.98,3654.98 2834.98,3654.98
GND_BAT: J_9V_in.2 J_9V_out1.2 St_GND.3 | length 565
  4-BOT w50: J_9V_in.2 J_9V_out1.2 St_GND.3@3690.98,2025.98
GND_MERE: CarteCPU.38 Cd_BT_1.1 Cd_BT_2.1 J_BT.3 | length 1143
  1-TOP w50: J_BT.3@2419.45,2617.52 2419.45,2805.98 ; Cd_BT_2.1 2947.83,2842.83 3253.48,3148.48
INT1: CarteCPU.21 R_IR_B1.1 | length 1408.5
  4-BOT w16: CarteCPU.21 2500.98,3244.13 2500.98,3060.98
  4-BOT w25: R_IR_B1.1@1825.98,2185.98 1825.98,2385.98 2500.98,3060.98
INT2: CarteCPU.22 R_IR_B2.1 | length 1899.1
  4-BOT w25: R_IR_B2.1@1740.98,1595.98 1765.98,1620.98 1765.98,2410.98 2450.98,3095.98 CarteCPU.22 CarteCPU.22@2450.98,3200.98
INT3: CarteCPU.6 R_IR_B3.1 | length 1774.8
  2-SIGNAL w25: CarteCPU.6 1650.98,3150.98 1675.98,3125.98 1980.98,3125.98 2085.98,3020.98 3045.98,3020.98 v1(3245.98,2820.98)
INT4: CarteCPU.5
NetD1_1: D1.1 RledBmere.2 | length 144.3
  4-BOT w50: v1@1950.98,3570.98 1968.9,3553.07 RledBmere.2
  other v1: 1945.98,3570.98
NetD3_1: D3.1 R3.2 | length 119.3
  4-BOT w50: R3.2 2488.07,3508.07 2488.07,3548.07 v1@2505.98,3565.98
  other v1: 2510.98,3570.98
NetDAssociateXbee_1: DAssociateXbee.1 RAssociateXbee.2
  other v1: 1845.98,1530.98
NetDbt_3: Dbt.3 J_BT.4 | length 199.7
  4-BOT w25: J_BT.4@2520.98,2625.98 J_BT.4 2520.98,2493.58 Dbt.3
NetDrj12_3: Drj12.3 J_uart2.4 | length 1118.4
  4-BOT w25: Drj12.3 Drj12.3@2775.98,2368.58 ; Drj12.3@2775.98,2365.98 2920.98,2365.98 3010.98,2275.98 3010.98,1940.98 3190.98,1760.98 3190.98,1635.98 3150.98,1595.98 J_uart2.4
NetDRxXbee_3: DRxXbee.3 U2.2 | length 1357
  2-SIGNAL w25: v1(2890.98,1935.98) 2980.98,1935.98 3190.98,1725.98 3190.98,1445.98 3000.98,1255.98 v1(2905.98,1255.98) v1@2900.98,1255.98
  4-BOT w25: DRxXbee.3 2748.39,2088.58 2900.98,1935.98 v1@2900.98,1930.98 ; U2.2 v1@2904.09,1257.87
NetDXbee_1: DXbee.1 RXbee.2
  other v1: 1845.98,1860.98
NetLED_B1_1: LED_B1.1 RledB1.1 | length 21.1
  4-BOT w50: RledB1.1@2170.98,3565.98 2185.75,3551.22 RledB1.1
  other v1: 2165.98,3570.98
NetLED_B2_1: LED_B2.1 RledB2.1
  other v1: 2290.98,3565.98
NetQTxXbee1_1: QTxXbee1.1 QTxXbee.2 RTxXbee1.2 | length 257.6
  4-BOT w25: RTxXbee1.2@2440.98,1360.98 2455.98,1345.98 2565.98,1345.98 2615.98,1395.98 2661.18,1395.98 QTxXbee.2
NetQTxXbee_1: QTxXbee.1 RTxXbee.2 U2.3 | length 115.2
  4-BOT w50: QTxXbee.1@2745.98,1380.98 2745.98,1352.24 2761.61,1336.61 U2.3
NetQXbee_1: QXbee.1 U2.5 | length 89.4
  4-BOT w50: QXbee.1@2755.98,1540.98 2802.87,1494.09 U2.5
NetRAssociateXbee_1: RAssociateXbee.1 U2.15 | length 140.9
  4-BOT w50: RAssociateXbee.1@1840.98,1625.98 1885.98,1625.98 1939.13,1572.83 U2.15
NetRXbee_1: RXbee.1 U2.13 | length 123.6
  4-BOT w50: RXbee.1@1850.98,1765.98 1886.65,1730.31 U2.13
PWM1: CarteCPU.10
PWM2: CarteCPU.12
PWM3: CarteCPU.14
PWM4: CarteCPU.16
QEA: CarteCPU.24
QEB: CarteCPU.23
RG2: CarteCPU.7 QXbee.2 RpXbee.1 | length 2600.3
  2-SIGNAL w16: 1600.98,3105.98 1600.98,3330.98 1625.98,3355.98 1689.13,3355.98 CarteCPU.7
  2-SIGNAL w25: 1600.98,3105.98 1625.98,3080.98 1930.98,3080.98 2115.98,2895.98 2115.98,2290.98 v1@2605.98,1800.98
  4-BOT w50: RpXbee.1 v1@2603.07,1800.98 ; RpXbee.1@2620.98,1594.33 QXbee.2
  other v1: 2605.98,1805.98
RG3: CarteCPU.8
RG6: CarteCPU.17 RledBmere.1 | length 217.4
  4-BOT w20: RledBmere.1@2085.98,3410.98 2140.98,3355.98 2195.98,3355.98 2250.98,3300.98 CarteCPU.17
RG7: CarteCPU.18 RledB1.2 | length 306.6
  4-BOT w16: RledB1.2@2200.98,3420.98 2255.98,3365.98 2285.98,3365.98 2300.98,3350.98 2300.98,3244.13 CarteCPU.18
RG8: CarteCPU.19 RledB2.2 | length 151.7
  4-BOT w25: RledB2.2@2290.98,3420.98 2350.98,3360.98 CarteCPU.19
RG9: CarteCPU.20 R3.1 | length 277.9
  4-BOT w16: CarteCPU.20 2400.98,3244.13 2400.98,3415.98 R3.1@2375.98,3440.98
SENS1: CarteCPU.9 Rsynchro_B1.1 | length 1267.6
  4-BOT w16: 1800.98,3135.98 1800.98,3244.13 CarteCPU.9
  4-BOT w20: Rsynchro_B1.1@1545.98,2210.98 1675.95,2340.95 1675.95,2684.95 ; 1655.98,2838.4 1655.98,3060.98 ; 1660.94,2833.98 1661.66,2833.27 1661.66,2813.05 1663.98,2810.73 1663.98,2773.16 1679.02,2758.12 1679.02,2714.57 1680.98,2712.61 1680.98,2689.98 1675.95,2684.95 ; 1677.98,2686.98 1675.95,2684.95
  4-BOT w25: 1655.98,3060.98 1695.98,3100.98 1765.98,3100.98 1800.98,3135.98
SENS2: CarteCPU.11 Rsynchro_B2.1 | length 2067
  4-BOT w16: Rsynchro_B2.1@1425.98,1580.98 1470.98,1625.98 1470.98,2135.98 1485.98,2150.98 1590.98,2150.98 1615.98,2175.98 1615.98,2200.98 1720.98,2305.98 1720.98,2460.98 1975.98,2715.98 1975.98,2805.98 1953.98,2827.98 1953.98,2839.97 1954.39,2840.38 1954.39,2912.58 1885.98,2980.98 1885.98,3045.98 1900.98,3060.98 1900.98,3244.13 CarteCPU.11
SENS3: CarteCPU.13 Rsynchro_B3.1 | length 322.6
  4-BOT w16: Rsynchro_B3.1@1950.98,3012.98 1950.98,3065.98 2000.98,3115.98 2000.98,3244.13 CarteCPU.13
SENS4: CarteCPU.15
SYNCHRO1: BFille1.4 Cprotect_Synchro_B1.1 Rsynchro_B1.2 | length 200.2
  4-BOT w50: Cprotect_Synchro_B1.1@1538.37,1888.37 BFille1.4 Rsynchro_B1.2@1538.37,2088.6
SYNCHRO2: BFille2.4 Cprotect_Synchro_B2.1 Rsynchro_B2.2 | length 243.5
  4-BOT w50: Cprotect_Synchro_B2.1@1500.98,1345.98 1500.98,1400.98 1538.07,1438.07 Rsynchro_B2.2
SYNCHRO3: Cprotect_Synchro_B3.1 Rsynchro_B3.2 US.5 US.6 | length 371.9
  4-BOT w50: US.6 1826.39,2830.58 1750.98,2905.98 1750.98,2950.98 1810.98,2950.98 1828.9,2968.9 Rsynchro_B3.2
U2RX: CarteCPU.35 Dbt.1 Drj12.1 DRxXbee.1 Ru2rx_Sup.1 | length 1466.4
  4-BOT w16: 3150.98,3090.98 3150.98,3095.98 3200.98,3145.98 3200.98,3244.13 CarteCPU.35
  4-BOT w25: Dbt.1 2688.58,2483.39 Drj12.1@2725.98,2445.98 ; 2665.98,2270.98 2688.58,2248.39 DRxXbee.1 ; 2675.98,2280.98 2705.98,2310.98 2705.98,2385.98 2728.58,2408.58 Drj12.1 2728.58,2488.58 2925.98,2685.98 2925.98,2865.98 3150.98,3090.98
  other v1: 2720.98,2485.98
U2TX: CarteCPU.36 J_BT.5 J_uart2.3 QTxXbee1.2 RpuTx.2 | length 2489.4
  2-SIGNAL w16: 2775.98,1525.98 2786.98,1536.98 2883.98,1536.98 2887.98,1532.98 v1@2900.98,1545.98
  2-SIGNAL w25: v1(2510.98,1445.98) 2695.98,1445.98 2775.98,1525.98 ; J_BT.5@2620.98,2615.98 2620.98,2425.98 v1(2875.98,2170.98)
  4-BOT w25: J_BT.5@2620.98,2620.98 J_BT.5 2620.98,2664.13 3059.41,3102.56 ; v1@2888.48,2153.48 2945.98,2095.98 2945.98,1840.98 2895.98,1790.98 2895.98,1595.98 2945.98,1545.98 J_uart2.3 ; J_uart2.3@2985.98,1540.98 J_uart2.3@3000.98,1540.98 ; 3060.98,3100.98 CarteCPU.36@3140.98,3180.98
  other v1: 2900.98,1550.98
VCC: CarteCPU.40 Cd_9V_in.2 Cin2.2 Cin.2 J6.1 J6.2 J_9V_in.1 J_9V_out1.1 Rvbat+.1 Ureg.1 US.15 US.16 | length 5829.7
  2-SIGNAL w50: US.15@1320.98,2750.98 1320.98,2675.98 2280.98,1715.98 2635.98,1715.98 2740.98,1820.98 2740.98,1920.98 3035.98,2215.98 J_9V_out1.1@3530.98,2215.98 ; J_9V_out1.1 J_9V_out1.1@3530.98,2225.98
  4-BOT w16: 3300.98,3350.98 3300.98,3244.13 CarteCPU.40
  4-BOT w25: Rvbat+.1@2950.98,3445.98 3205.98,3445.98 3300.98,3350.98
  4-BOT w50: Ureg.1 2325.94,1585.94 2425.98,1685.98 v1(2505.98,1685.98) ; J6.1 3070.98,2565.98 J6.2@3125.98,2620.98 ; J_9V_in.1@3120.98,2205.98 J_9V_out1.1@3530.98,2205.98 ; J_9V_in.1 J6.2@3125.98,2610.98 ; CarteCPU.40@3355.98,3185.98 3355.98,3145.98 3525.98,2975.98 J_9V_out1.1 ; CarteCPU.40@3355.98,3190.98 3421.3,3190.98 Cd_9V_in.2
pads on no net: Dbt.2 Drj12.2 DRxXbee.2 J6.3 J_BT.1 J_BT.6 J_uart2.1 J_uart2.2 J_uart2.FIX1 J_uart2.FIX2 U2.4 U2.6 U2.7 U2.8 U2.9 U2.11 U2.12 U2.14 U2.16 U2.17 U2.18 U2.19 U2.20 US.1 US.2 US.3 US.4 US.7 US.8 US.9 US.10

## Polygon pours and split planes (outlines as drawn)
GND on 4-BOT "4-GND" (solid, pour order 1000): 1025.98,3415.98 1260.98,3415.98 1260.98,3730.98 3495.98,3730.98 3495.98,3415.98 3730.98,3415.98 3730.98,1220.98 1025.98,1220.98
GND on 3-SIGNAL "3-GND" (solid, pour order 1001): 1025.98,3415.98 1260.98,3415.98 1260.98,3730.98 3495.98,3730.98 3495.98,3415.98 3730.98,3415.98 3730.98,1220.98 1025.98,1220.98
GND on 2-SIGNAL "2-GND" (solid, pour order 1002): 1025.98,3415.98 1260.98,3415.98 1260.98,3730.98 3495.98,3730.98 3495.98,3415.98 3730.98,3415.98 3730.98,1220.98 1025.98,1220.98
GND on 1-TOP "1-GND" (solid, pour order 1003): 1025.98,3415.98 1260.98,3415.98 1260.98,3730.98 3495.98,3730.98 3495.98,3415.98 3730.98,3415.98 3730.98,1220.98 1025.98,1220.98

## Keep-outs
Keep-Out Layer:
  lines w20: 1235.98,3440.98 1000,3440.98 1000,1000 3755.98,1000 ; 1235.98,3755.91 3520.91,3755.91 3520.98,3755.98 3520.98,3440.98 3755.98,3440.98 ; 1236.22,3440.94 1236.22,3755.91 ; 3755.91,1000 3755.91,3440.98

## Other copper
1-TOP:
  pour cut-out: 942.6,1220.98 939.32,865.98 3990.98,865.98 3990.98,1220.98
  pour cut-out: 1144.25,1441.98 1143.77,1389.98 1262.2,1389.98 1262.2,1441.98
2-SIGNAL:
  pour cut-out: 942.6,1220.98 939.32,865.98 3990.98,865.98 3990.98,1220.98
3-SIGNAL:
  pour cut-out: 942.6,1220.98 939.32,865.98 3990.98,865.98 3990.98,1220.98
4-BOT:
  pour cut-out: 942.6,1220.98 939.32,865.98 3990.98,865.98 3990.98,1220.98
  pour cut-out: 3620.22,2043.98 3619.74,1991.98 3738.18,1991.98 3738.18,2043.98

## Silkscreen, mask and mechanical layers (free items; w line width, h text height)
Top Overlay:
  text "Mere" at 1975.98,3684.13 h40 r180
  text "B1" at 2145.98,3684.13 h40 r180
  text "B2" at 2360.98,3684.13 h40 r180
  text "BAT" at 2600.98,3684.13 h40 r180
  text "IR" at 3590.98,2980.98 h40
  text "Bluetooth" at 2825.98,2635.98 h40 r270
  text "Status" at 1840.98,2139.13 h40 r270
  text "H L" at 1090.98,1629.13 h60
  text "UART2" at 3701.98,1576.98 h40 r90
  text "Associate" at 1825.98,1374.13 h40 r270
  text "ROBOT ESEO" at 2915.98,1137.98 h120
  text "Balise Mere" at 1310.98,1034.98 h120
  text "2012" at 2914.98,1034.98 h120
Mechanical 15:
  text ".Hole_Count" at 7840.98,9155.98 h60

## Dimensions
1000,1000 to 3755.91,1000 on Mechanical 15
1235.98,3755.91 to 1000,1000 on Mechanical 15
1235.98,3440.98 to 1235.98,3755.91 on Mechanical 15
1000,3440.98 to 1236.22,3755.91 on Mechanical 15
3598.42,1157.48 to 3755.91,1000 on Mechanical 15
3598.42,1157.48 to 3755.98,1000 on Mechanical 15
2377.95,2377.95 to 3755.98,1000 on Mechanical 15
2377.95,2377.95 to 3755.91,3440.98 on Mechanical 15

## Text inside footprints (layer, text, board x,y; h text height)
US: Top Overlay "18" at 1153.24,2654.39 h50 r190; Top Overlay "17" at 1135.88,2752.87 h50 r190; Top Overlay "1" at 2100.99,2923.05 h50 r190; Top Overlay "2" at 2138.05,2828.04 h50 r190